# Altium PCB PCB.PcbDoc
Units mm, origin at the board's own origin, x right, y up, seen from the top; angles counter-clockwise.
Board outline 68.95 x 68.22 mm, 3 copper layers (Top Layer, Mid-Layer 1, Bottom Layer); 72 components, 51 nets, 203 pads, 270 vias.
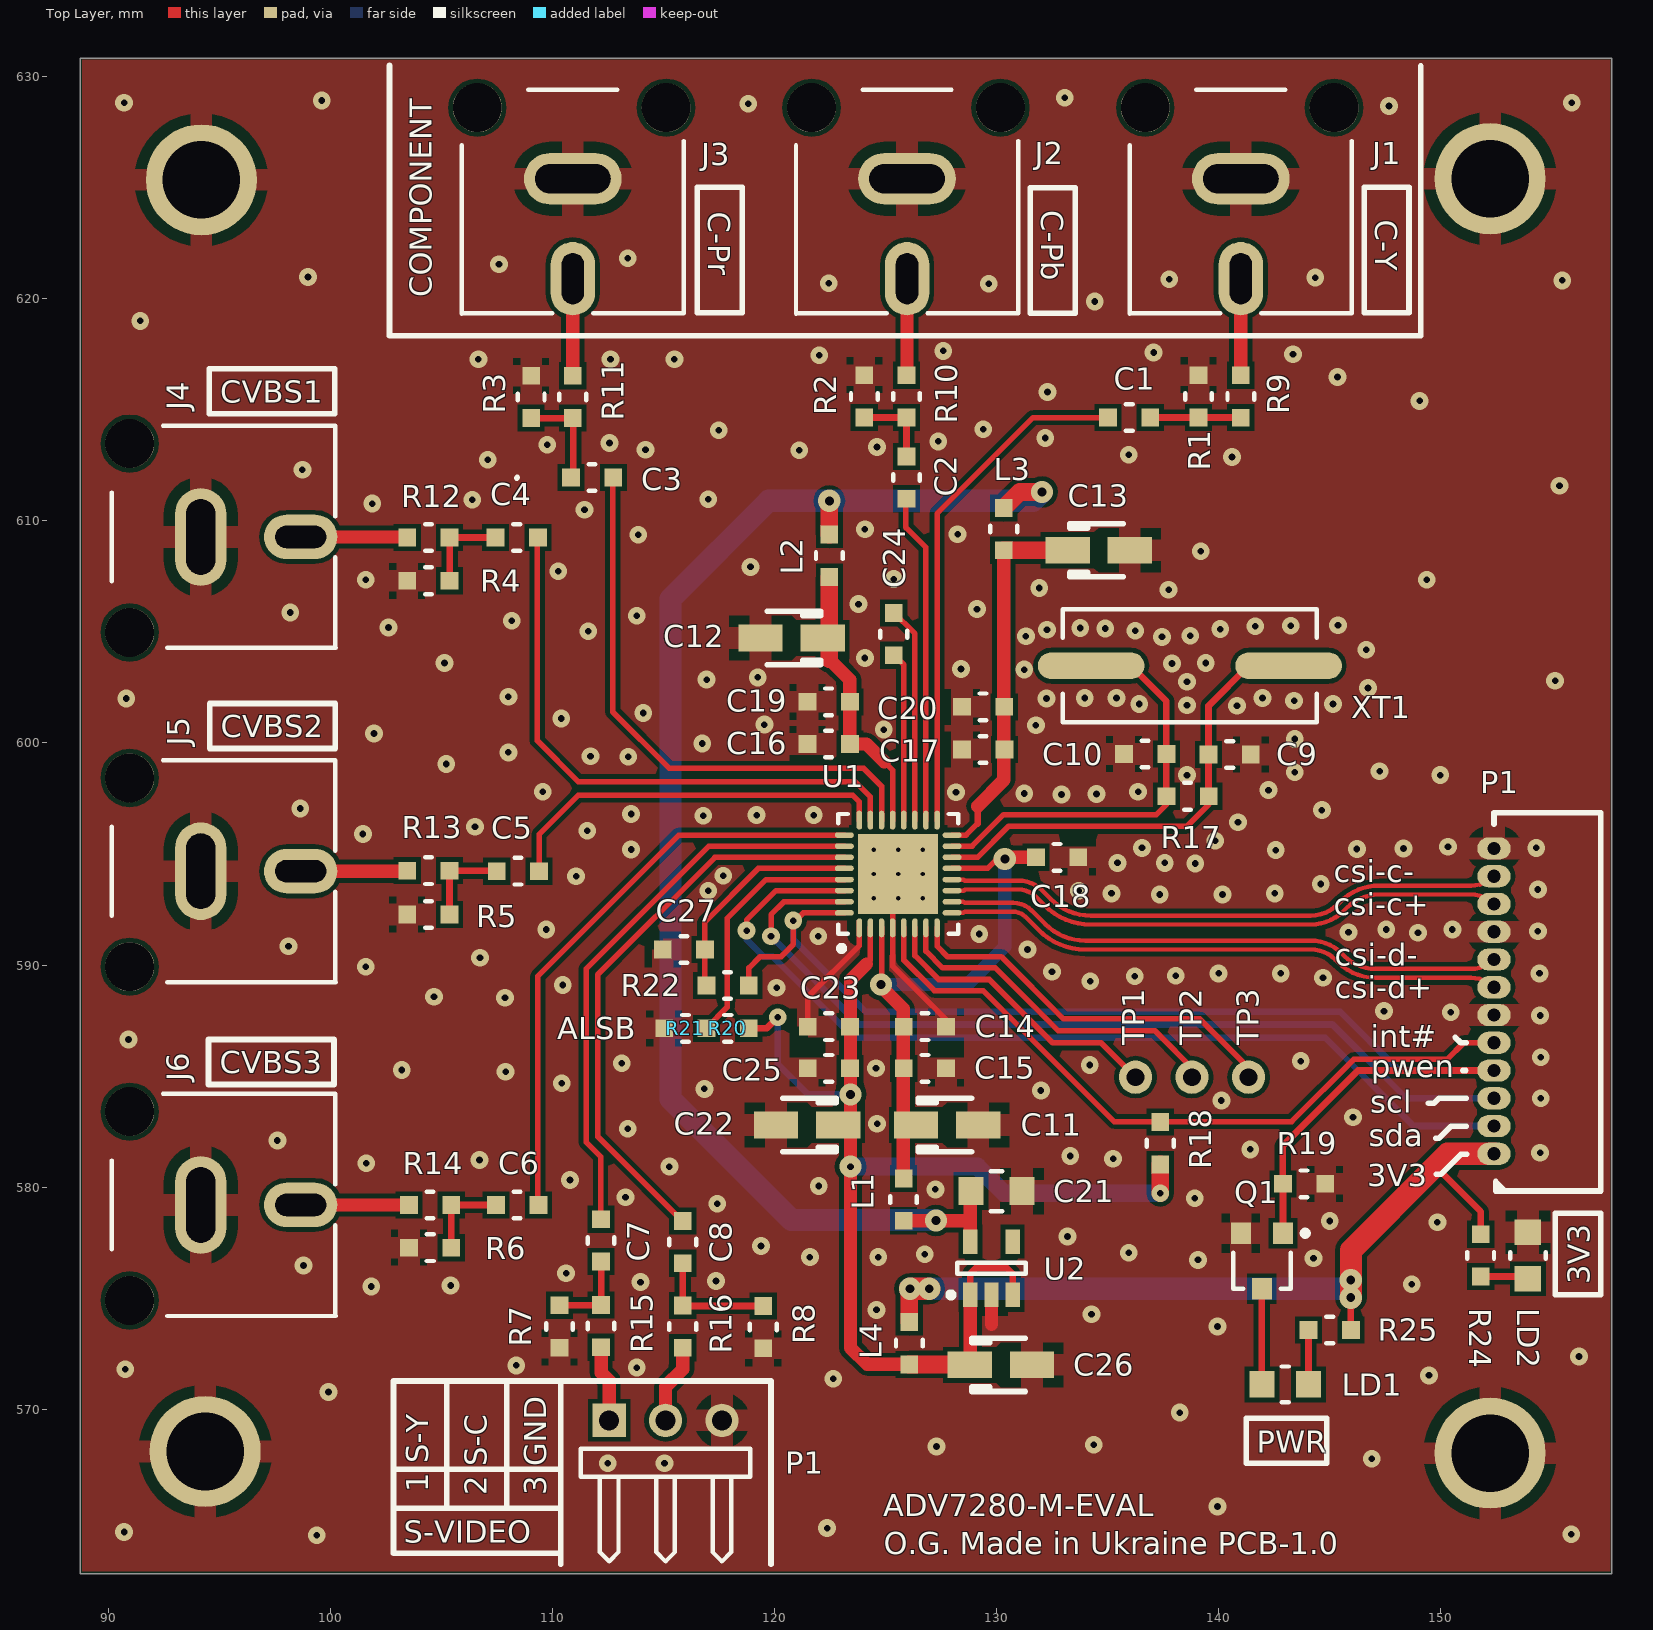
[diagram p0: Top Layer view]
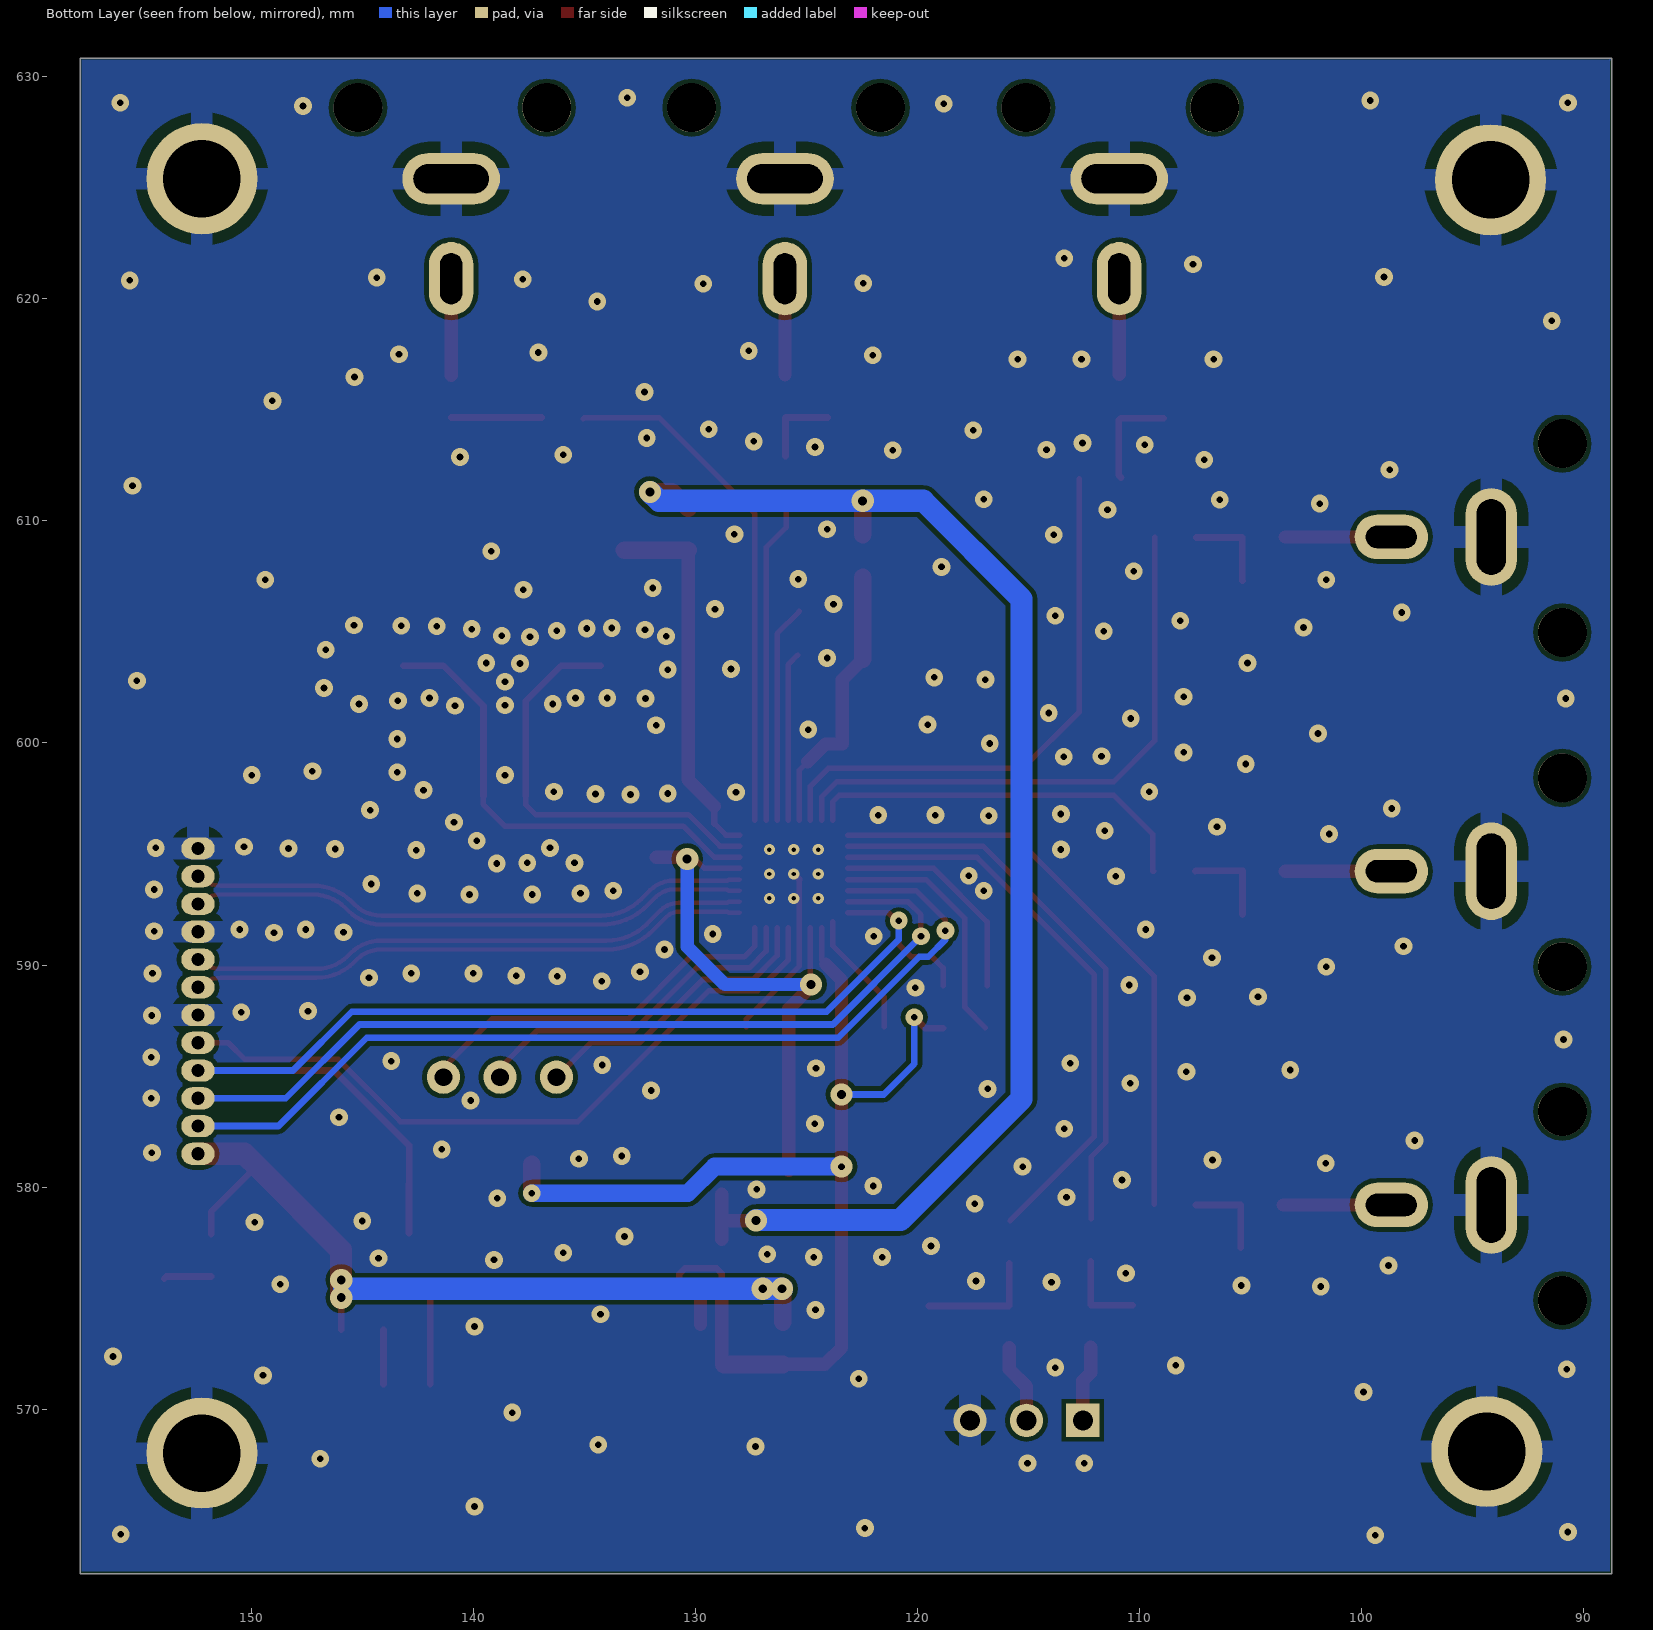
[diagram p1: Bottom Layer view, seen from below]
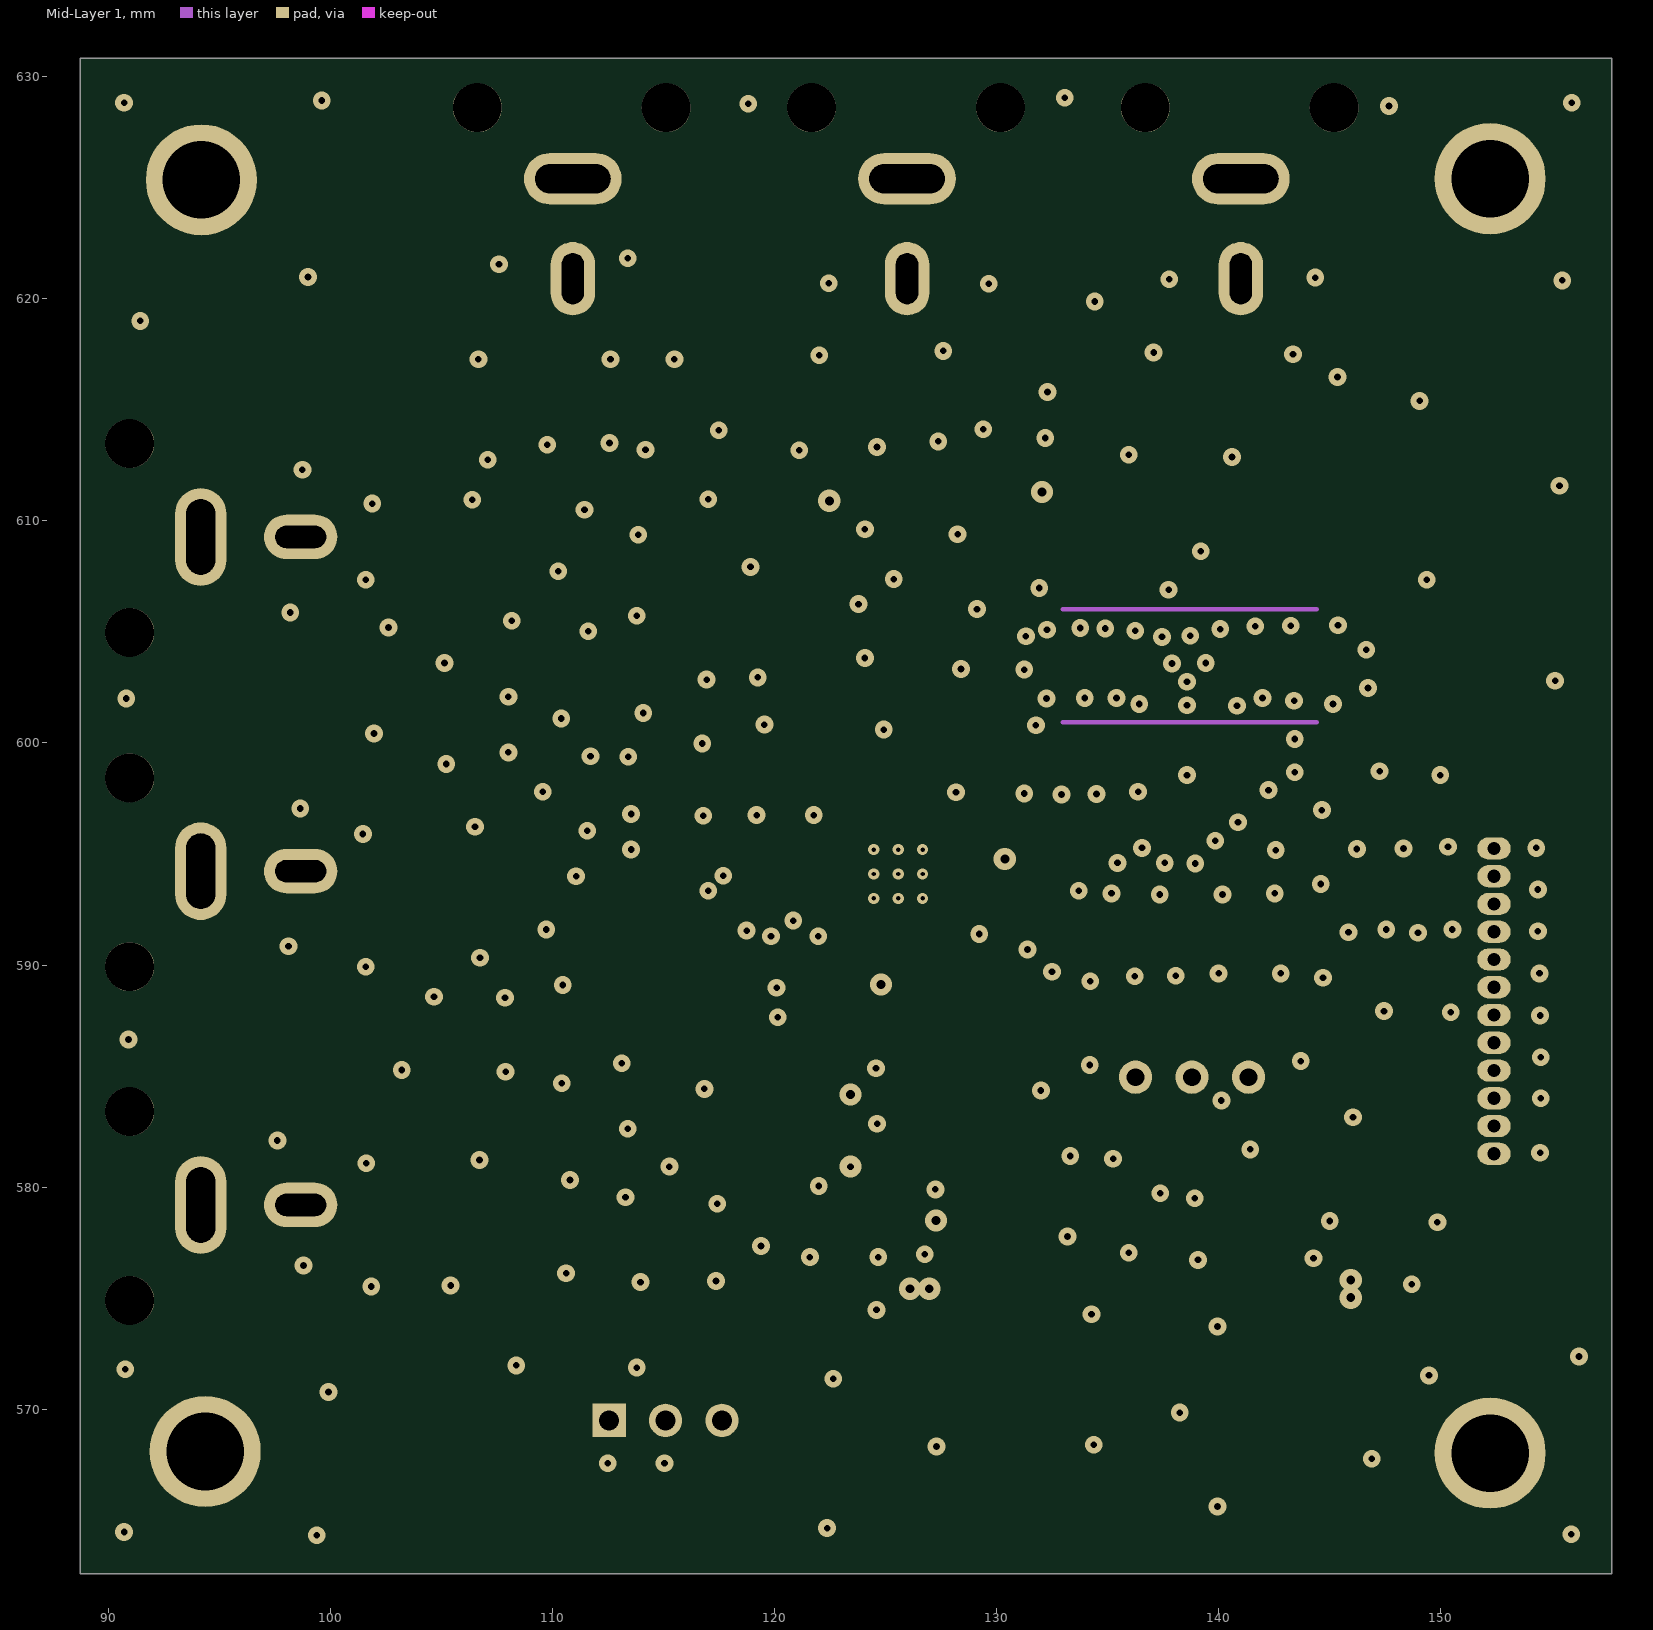
[diagram p2: Mid-Layer 1]
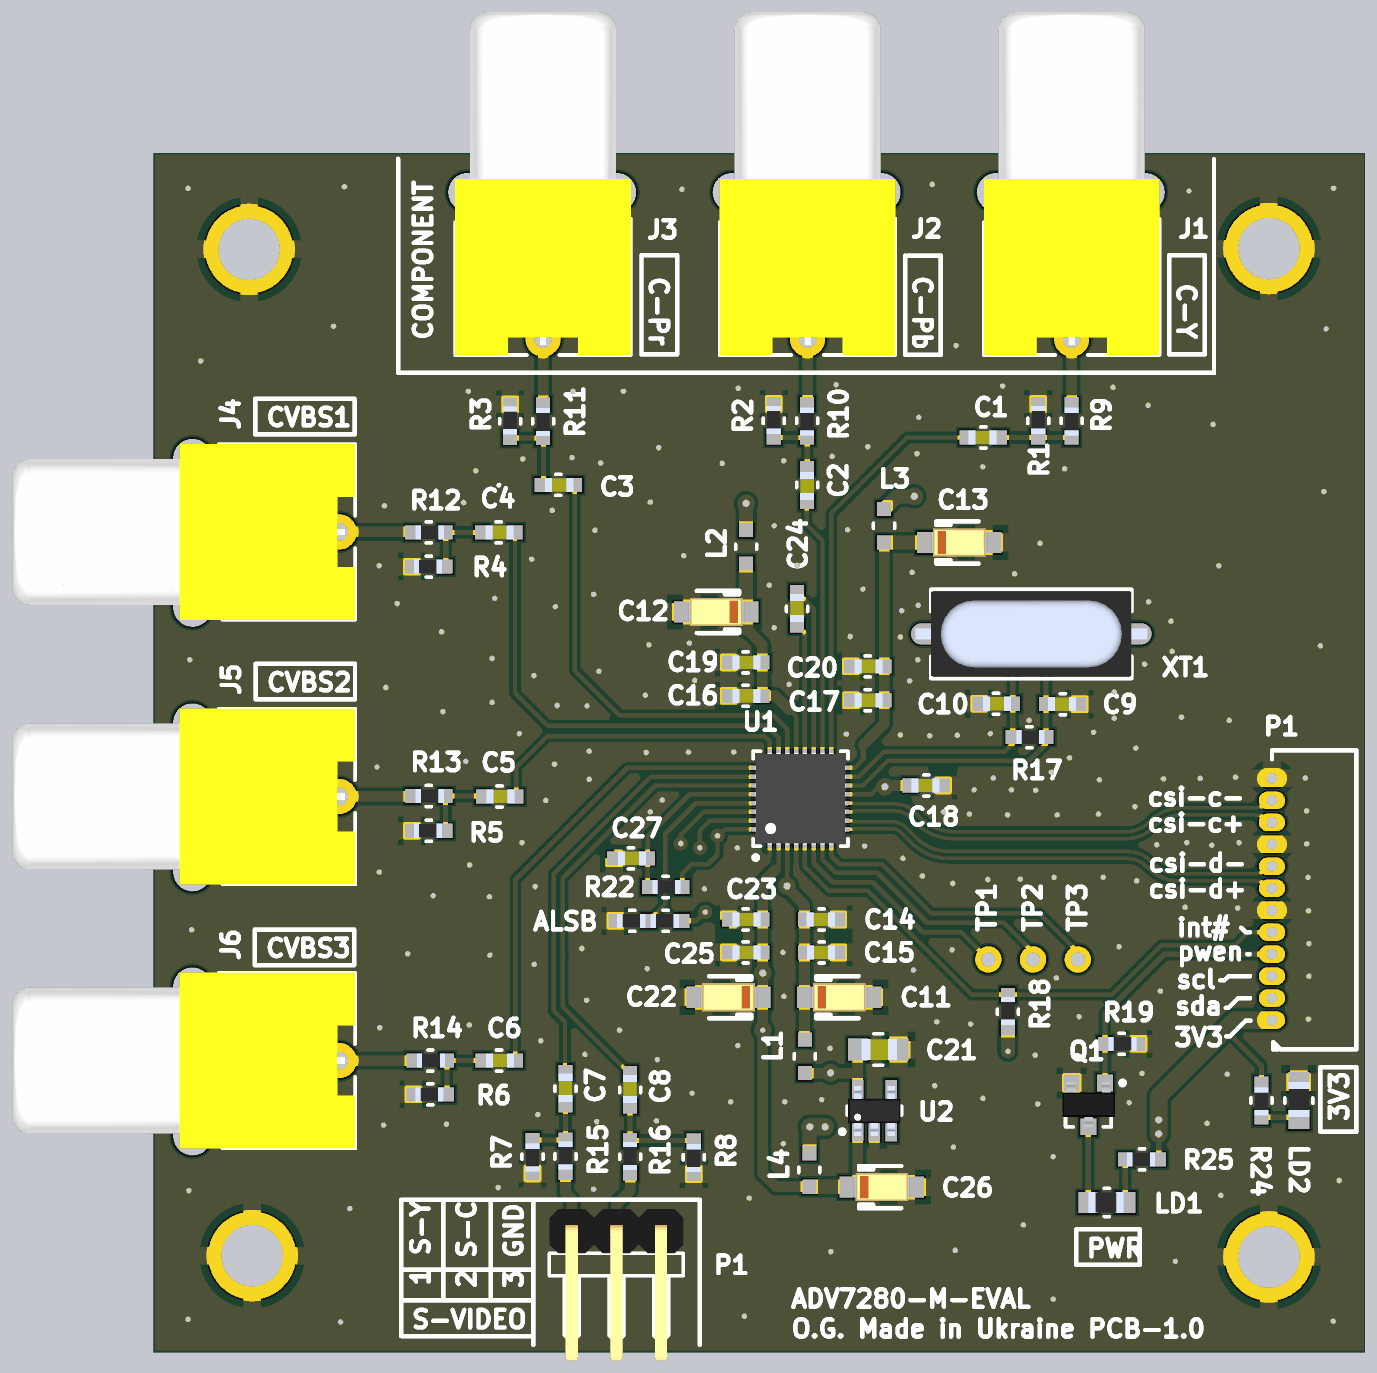
[diagram p3: 3D render of the assembled board from above, using the file's embedded part models]

## Layer stack, top to bottom
Top Solder: solder mask 0.0102, Solder Resist, Dk 3.5
Top Layer: signal copper 0.0356
Dielectric 1: dielectric 0.32, FR-4, Dk 4.8
Mid-Layer 1: signal copper 0.0356
Dielectric2: dielectric 0.32, FR-4, Dk 4.8
Bottom Layer: signal copper 0.0356
Bottom Solder: solder mask 0.0102, Solder Resist, Dk 3.5

## Board outline
88.775,630.825 88.75,630.8 88.75,562.6 157.7,562.6 157.7,630.825

## Design rules (kind name [scope] priority, off if disabled: settings)
Clearance Clearance_1 [All] p1 off: gap=0.4 ignorepadtopadclearanceinfootprint=FALSE except(0.2: Arc-SMDPad Track-SMDPad SMDPad-SMDPad)
Clearance [All] p2: gap=0.2 ignorepadtopadclearanceinfootprint=FALSE
DiffPairsRouting [All] p1: maxlimit=0.2 minlimit=0.2 mostfreqgap=0.2 toplayer_minwidth=0.2 toplayer_maxwidth=0.2 toplayer_prefwidth=0.2 midlayer1_minwidth=0.2 midlayer1_maxwidth=0.2 midlayer1_prefwidth=0.2 bottomlayer_minwidth=0.2 bottomlayer_maxwidth=0.2 bottomlayer_prefwidth=0.2 maxuncoupledlength=0
MatchedLengths [All] p1: tolerance=1 checknetsindiffpair=TRUE checkdiffpairvsdiffpair=FALSE checkxsignals=FALSE checkothers=FALSE
MaxMinImpedance [All] p1: minimum=100,0 maximum=100,0
ParallelSegment [All] p1: limit=254 gap=0.254
PlaneConnect [All] p1: pad.planeconnectstyle=Relief pad.reliefexpansion=0.508 pad.reliefentries=4 pad.reliefconductorwidth=1 pad.reliefairgap=0.5 via.planeconnectstyle=Direct via.reliefexpansion=0.508 via.reliefentries=4 via.reliefconductorwidth=0.254 via.reliefairgap=0.254
PolygonConnect [All] p1: thpad.connectstyle=Relief thpad.reliefconductorwidth=1 thpad.reliefentries=4 thpad.polygonreliefangle="90 Angle" thpad.airgapwidth=0.5 smdpad.connectstyle=Relief smdpad.reliefconductorwidth=1 smdpad.reliefentries=4 smdpad.polygonreliefangle="90 Angle" smdpad.airgapwidth=0.4 via.connectstyle=Direct via.reliefconductorwidth=0.254 via.reliefentries=4 via.polygonreliefangle="90 Angle" via.airgapwidth=0.254
RoomDefinition adv7280m [InComponentClass('adv7280m')] p1 off: confinementstyle=ConfineIn formatcopy=TRUE lockcomponents=FALSE outline 264.888,480.923 309.1,480.923 309.1,502.95 264.888,502.95
RoutingCorners [All] p1: cornerstyle=Round minsetback=2.54 maxsetback=2.54
RoutingVias [All] p1: holewidth=0.3 width=0.8 viastyle="Through Hole" minholewidth=0.3 minwidth=0.8 maxholewidth=0.5 maxwidth=1
SilkToSilkClearance [All] p1: silktosilkclearance=0.2
SolderMaskExpansion [All] p1: expansion=0.102
UnRoutedNet [All] p1: checkbadconnections=TRUE
Width [All] p1: maxlimit=5 minlimit=0.2 preferedwidth=0.3
25 further rules are at their usual default settings.

## Classes and differential pairs
differential pair CSI_D0: +CSI_D0_P -CSI_D0_N
differential pair CSI_CLK: +CSI_CLK_P -CSI_CLK_N

## Components (designator, comment, footprint, x,y, rotation, side; value= is the part's Value field where it differs from the comment)
C1 "C1608X7R1H104K080AA" C0603 136.925,614.65 r180 top value=0.1uF
C2 "C1608X7R1H104K080AA" C0603 125.95,612.9 r270 top value=0.1uF
C3 "C1608X7R1H104K080AA" C0603 110.845,611.95 r0 top value=0.1uF
C4 "C1608X7R1H104K080AA" C0603 107.45,609.25 r0 top value=0.1uF
C5 "C1608X7R1H104K080AA" C0603 107.5,594.225 r0 top value=0.1uF
C6 "C1608X7R1H104K080AA" C0603 107.47,579.2 r0 top value=0.1uF
C7 "C1608X7R1H104K080AA" C0603 112.2,576.65 r90 top value=0.1uF
C8 "C1608X7R1H104K080AA" C0603 115.875,576.575 r90 top value=0.1uF
C9 "CC0603JRNPO9BN470" C0603 141.45,599.475 r180 top value=47pF
C10 "CC0603JRNPO9BN470" C0603 135.745,599.5 r0 top value=47pF
C11 "293D226X9010A2TE3" TANTAL-A-1206 127.775,582.8 r0 top value=22uF
C12 "293D226X9010A2TE3" TANTAL-A-1206 120.775,604.725 r180 top value=22uF
C13 "293D226X9010A2TE3" TANTAL-A-1206 134.6,608.675 r0 top value=22uF
C14 "CL10B103KB8NNNC" C0603 127.725,587.225 r180 top value=0.01uF
C15 "C1608X7R1H104K080AA" C0603 127.73,585.35 r180 top value=0.1uF
C16 "CL10B103KB8NNNC" C0603 121.495,599.95 r0 top value=0.01uF
C17 "CL10B103KB8NNNC" C0603 128.45,599.7 r0 top value=0.01uF
C18 "C1608X7R1H104K080AA" C0603 133.68,594.85 r180 top value=0.1uF
C19 "C1608X7R1H104K080AA" C0603 121.495,601.85 r0 top value=0.1uF
C20 "C1608X7R1H104K080AA" C0603 128.445,601.625 r0 top value=0.1uF
C21 "CL21A226MQQNNNE" C0805 129.05,579.825 r0 top value="22uF 6.3v"
C22 "293D226X9010A2TE3" TANTAL-A-1206 121.475,582.8 r180 top value=22uF
C23 "CL10B103KB8NNNC" C0603 121.5,587.225 r0 top value=0.01uF
C24 "C1608X7R1H104K080AA" C0603 125.375,603.945 r90 top value=0.1uF
C25 "C1608X7R1H104K080AA" C0603 121.5,585.35 r0 top value=0.1uF
C26 "293D226X9010A2TE3" TANTAL-A-1206 130.2,572 r0 top value=22uF
C27 "C1608X7R1H104K080AA" C0603 114.975,590.7 r0 top value=0.1uF
J1 "C-Y" RCJ-044 141,629.4 r90 top locked
J2 "C-Pb" RCJ-044 125.975,629.4 r90 top locked
J3 "C-Pr" RCJ-044 110.925,629.4 r90 top locked
J4 "CVBS1" RCJ-044 90.175,609.275 r180 top locked
J5 "CVBS2" RCJ-044 90.175,594.225 r180 top locked
J6 "CVBS3" RCJ-044 90.175,579.2 r180 top locked
L1 "BLM18AG102SN1D" IND0603 125.82,578.487 r90 top value=EMIF
L2 "BLM18AG102SN1D" IND0603 122.475,609.38 r270 top value=EMIF
L3 "BLM18AG102SN1D" IND0603 130.325,610.58 r270 top value=EMIF
L4 "BLM18AG102SN1D" IND0603 126.075,573.925 r270 top value=EMIF
LD1 "LED_Y" R0805 143.95,571.125 r180 top
LD2 "LED_G" R0805 153.925,575.975 r90 top
P1 "S-VIDEO" PLS-3R 112.56,569.5 r0 top locked
P1 "HDR 12" 1.25-12AW 152.4,588.375 r90 top locked
Q1 "IRLML2402" SOT-23-3 141.95,576.675 r180 top
R1 "51" R0603 139.1,614.65 r90 top
R2 "51" R0603 124.05,614.65 r90 top
R3 "51" R0603 109.05,614.625 r90 top
R4 "51" R0603 105.375,607.3 r180 top
R5 "51" R0603 105.375,592.275 r180 top
R6 "51" R0603 105.455,577.275 r180 top
R7 "51" R0603 110.325,574.68 r270 top
R8 "51" R0603 119.5,574.65 r270 top
R9 "24" R0603 141,616.55 r270 top
R10 "24" R0603 125.95,616.555 r270 top
R11 "24" R0603 110.925,616.53 r270 top
R12 "24" R0603 103.475,609.25 r0 top
R13 "24" R0603 103.475,594.25 r0 top
R14 "24" R0603 103.55,579.2 r0 top
R15 "24" R0603 112.2,572.795 r90 top
R16 "24" R0603 115.875,572.77 r90 top
R17 "1M" R0603 137.65,597.6 r0 top
R18 "10k" R0603 137.375,581.025 r90 top
R19 "47k" R0603 142.895,580.15 r0 top
R20 "10k" R0603 118.85,587.15 r180 top
R21 "DNI" R0603 116.945,587.15 r180 top
R22 "15k" R0603 116.945,589.075 r0 top
R24 "470" R0603 151.8,577.88 r270 top
R25 "470" R0603 145.955,573.575 r180 top
TP1 "TEST-POINT" PAD 136.26,584.95 r0 top
TP2 "TEST-POINT" PAD 138.8,584.95 r0 top
TP3 "TEST-POINT" PAD 141.35,584.95 r0 top
U1 "ADV7280BCPZ-M" CP-32-12 125.575,594.1 r90 top locked
U2 "TLV75718PDBVR" SOT-23-5 129.775,576.35 r90 top locked value=TLV733P
XT1 "28.63636 MHz" HC-49/S-SMD 143.15,603.475 r180 top

## Footprints (in the part's own frame and the unit in brackets; to place one, negate y for a bottom-side part, rotate by r counter-clockwise, add the part's x,y. Pads: shape width x height; smd on the part's side, far side on the other; paste and mask are expansions set on the pad)
1.25-12AW [mm] "Connector; 12 Positions; Right Angle"
  oval 1x1.5 hole 0.6: 1(-6.875,0) 2(-5.625,0) 3(-4.375,0) 4(-3.125,0) 5(-1.875,0) 6(-0.625,0) 7(0.625,0) 8(1.875,0) 9(3.125,0) 10(4.375,0) 11(5.625,0) 12(6.875,0)
  silkscreen extent -8.54,-4.8 8.48,0
C0603 [mm]
  rect 0.8x0.8 smd: 1(1.905,0) 2(0,0)
  silkscreen extent 0.8,-0.6 1.1,0.6, body extent 0.2,-0.4 1.8,0.4, height 0.9
C0805 [mm]
  rect 1.14x1.27 smd: 1(2.1,0) 2(-0.2,0)
  silkscreen extent 0.7,-0.9 1.2,0.9, body extent 0,-0.6 2,0.6, height 0.9
CP-32-12 [mm] "32-Lead Lead Frame Chip Scale Package 5?5mm Body, Very Very Thin Quad  (CP-32-12)"
  oval 0.85x0.25 smd: 1(-2.425,1.75) 2(-2.425,1.25) 3(-2.425,0.75) 4(-2.425,0.25) 5(-2.425,-0.25) 6(-2.425,-0.75) 7(-2.425,-1.25) 8(-2.425,-1.75) 17(2.425,-1.75) 18(2.425,-1.25) 19(2.425,-0.75) 20(2.425,-0.25) 21(2.425,0.25) 22(2.425,0.75) 23(2.425,1.25) 24(2.425,1.75)
  oval 0.25x0.85 smd: 9(-1.75,-2.425) 10(-1.25,-2.425) 11(-0.75,-2.425) 12(-0.25,-2.425) 13(0.25,-2.425) 14(0.75,-2.425) 15(1.25,-2.425) 16(1.75,-2.425) 25(1.75,2.425) 26(1.25,2.425) 27(0.75,2.425) 28(0.25,2.425) 29(-0.25,2.425) 30(-0.75,2.425) 31(-1.25,2.425) 32(-1.75,2.425)
  rect 3.6x3.6 smd: 33(0,0)
  silkscreen extent -3.47,-2.7 2.7,2.7, body extent -2.6,-2.6 2.6,2.6, height 0.8
HC-49/S-SMD [mm]
  oval 4.8x1.2 smd: 1(0,0) 2(8.89,0)
  Mid-Layer 1 lines w0.2: 10.16,2.54 -1.27,2.54 ; 10.16,-2.54 9.525,-2.54 -1.27,-2.54
  silkscreen extent -1.27,-2.54 10.16,2.54, body extent -2.16,-2.4 11.05,2.4, height 4.3
IND0603 [mm]
  rect 0.8x0.8 smd: 1(1.905,0) 2(0,0)
  silkscreen extent 0.8,-0.6 1.1,0.6
PAD [mm]
  round 1.5 hole 0.8: 1(0,0)
PLS-3R [mm] "Connector; Header; 3 Position; Right Angle"
  rect 1.5x1.5 hole 0.9: 1(0,0)
  round 1.5 hole 0.9: 2(2.54,0) 3(5.08,0)
  silkscreen extent -1.27,-6.35 6.35,-1.27, body extent -1.27,-7.36 6.35,1.26, height 5.45
R0603 [mm]
  rect 0.8x0.8 smd: 1(1.905,0) 2(0,0)
  silkscreen extent 0.8,-0.6 1.1,0.6, body extent 0.2,-0.4 1.8,0.4, height 0.5
R0805 [mm]
  rect 1.14x1.2 smd: 1(2,0) 2(-0.1,0)
  silkscreen extent 0.79,-0.8 1.1,0.8, body extent 0,-0.6 2,0.6, height 0.5
RCJ-044 [mm] "Two Conductor Jack (RCA), Right Angle, Thru-Hole, Body 10x10x13 mm (WxTxH)"
  oval 2.3x4.4 hole 1.3 slot 3.4 at 90 deg: 1(-4,0)
  oval 3.3x2 hole 1 slot 2.3 at 0 deg: 2(-8.5,0)
  round 2.2 hole 2.2 unplated: H(-0.8,4.3) H(-0.8,-4.2)
  silkscreen extent -10.07,-5 0,5, body extent -10.05,-5 9.45,5, height 12
SOT-23-3 [mm]
  rect 0.9x0.95 smd: 1(-0.95,-1.25) 2(0.95,-1.25) 3(0,1.25)
  silkscreen extent -2.07,-1.37 1.3,1.25, body extent -1.52,-1.29 1.48,1.25, height 1.1
SOT-23-5 [mm] "SOT23, 5-Leads, Body 2.9x1.6mm, Pitch 0.95mm, Lead Span 2.8mm, IPC Medium Density"
  rect 1.1x0.65 smd: 1(-1.2,0.95) 2(-1.2,0) 3(-1.2,-0.95) 4(1.2,-0.95) 5(1.2,0.95)
  silkscreen extent -1.32,-1.55 0.25,1.95, body extent -1.44,-1.5 1.4,1.5, height 1.1
TANTAL-A-1206 [mm]
  rect 2x1.2 smd: 1(-1.4,0) 2(1.4,0)
  silkscreen extent -1.3,-1.2 1.1,1.2, body extent -1.6,-0.8 1.6,0.8, height 1.8

## Part data
C1 C2 C3 C4 C5 C6 C7 C8 C9 C10 C14 C15 C16 C17 C18 C19 C20 C21 C23 C24 C25 C27: library part CAP_NPOL, "CAP_NPOL"
C11 C12 C13 C22 C26: library part CAP_POL, "CAP_POL"
J1 J2 J3 J4 J5 J6: library part RCA, "RCA Phono Jack, Right Angle, Thru-Hole, Snap-In"
L1 L2 L3 L4: library part IND_WO_IRON, "IND_WO_IRON"
LD1: library part LED_YELLOW, "LED Yellow"
LD2: library part LED_GREEN, "LED Green"
P1: library part "HDR 3", "Header, 3-Pin", LatestRevisionDate=17-Jul-2002, LatestRevisionNote="Re-released for DXP Platform.", Publisher="Altium Limited"
P1: "Header, 12-Pin", LatestRevisionDate=17-Jul-2002, LatestRevisionNote="Re-released for DXP Platform.", Publisher="Altium Limited"
Q1: library part N-Channel, "HEXFET Power MOSFET"
R1 R2 R3 R4 R5 R6 R7 R8 R9 R10 R11 R12 R13 R14 R15 R16 R17 R18 R19 R20 R21 R22 R24 R25: library part RESISTOR, "RES"
TP1 TP2 TP3: "PCB terminal block"
U1: "10-Bit, 4xOversampling SDTV Video Decoder"
U2: library part TLV733P, "Capacitor-Free, 300-mA, Low-Dropout Regulator with Foldback Current Limit for Portable Devices"
XT1: library part XTAL, "Xtal"

## Free pads (board coordinates)
  round 5 hole 3.5: MH(94.2,625.35) MH(94.375,568.1) MH(152.225,568.025) MH(152.225,625.4)

## Via types
v1: diameter 0.8, hole 0.3, Top Layer to Bottom Layer, tented both sides, 250 vias
v2: diameter 1, hole 0.4, Top Layer to Bottom Layer, tented both sides, 10 vias
v3: diameter 0.5, hole 0.2, Top Layer to Bottom Layer, 9 vias
v4: diameter 1, hole 0.3, Top Layer to Bottom Layer, tented both sides, 1 vias

## Nets (pads, with @x,y where several pads share a name; then routed paths per layer and width w, separated by ;. In a path a pad name is that pad's centre, name@x,y a point inside that pad or via, vN(x,y) a via of type N, cw(c..) or ccw(c..) an arc to the next point about the centre after c; other vN are vias at no path point)
3V3: L4.2 P1.1@152.4,581.5 R24.2 R25.2 | length 37.9
  Top Layer w0.3: v2@126.075,575.4 v2(126.1,575.425) ; R25.2 v2@145.955,575.025 ; 149.65,580.85 149.85,580.85 151.8,578.9 R24.2
  Top Layer w0.8: L4.2 v2@126.075,575.4
  Top Layer w1: v2(126.1,575.425) v2(126.975,575.425) ; v2@145.955,575.025 145.955,577.155 149.65,580.85 150.3,581.5 P1.1@152.4,581.5
  Bottom Layer w1: v2(126.1,575.425) v2(126.975,575.425) v2@145.825,575.425
  other v2: 145.95,575.025 145.95,575.825
ADV_1V8: C21.2 L1.2 L2.2 L3.2 U2.5 | length 64
  Top Layer w0.6: L1.2 128.825,578.487 ; U2.5@128.825,577.65 128.825,578.487 ; C21.2@128.825,579.675 128.825,578.487
  Top Layer w0.8: L2.2 v2(122.475,610.9) ; L3.2 131.045,611.3 v2(132.05,611.3)
  Bottom Layer w1: v2@127.275,578.525 120.775,578.525 115.325,583.975 115.325,606.475 119.75,610.9 v2(122.475,610.9) 131.65,610.9 v2(132.05,611.3)
  other v2: 127.275,578.5
ADV_AVDD: C12.1 C16.1 C19.1 L2.1 U1.21 | length 12.5
  Top Layer w0.25: 124.95,599.15 125.325,598.775 U1.21
  Top Layer w0.6: 122.475,603.775 123.4,602.85 C19.1 C16.1 124.15,599.95 124.95,599.15
  Top Layer w0.8: 122.475,603.775 L2.1@122.475,607.45
ADV_DVDD: C11.1 C14.1 C15.1 C18.1 L1.1 U1.3 U1.13 | length 25.5
  Top Layer w0.25: v2@124.825,589 U1.3 ; U1.13 129.6,594.35 v2@130.025,594.775
  Top Layer w0.3: v2@130.025,594.775 v2(130.375,594.775) v2@130.45,594.85
  Top Layer w0.6: v2@124.825,589 125.8,588.025 L1.1@125.8,580.755 ; v2@130.45,594.85 C18.1
  Bottom Layer w0.6: v2(124.8,589.125) 128.675,589.125 130.375,590.825 v2(130.375,594.775)
ADV_PVDD: C13.1 C17.1 C20.1 L3.1 U1.16 | length 17
  Top Layer w0.25: U1.16 128.628,595.85 129.15,596.372
  Top Layer w0.3: 129.15,596.372 129.15,597.155
  Top Layer w0.6: 129.15,597.155 130.325,598.329 L3.1@130.325,608.65
  Top Layer w0.8: L3.1 C13.1
ADV_VDDIO: C22.1 C23.1 C25.1 C26.1 L4.1 R18.2 R20.2 U1.2 U2.1 U2.3 | length 55.3
  Top Layer w0.25: 124.15,590.05 124.325,590.225 U1.2
  Top Layer w0.3: R20.2 119.65,587.15 v1(120.15,587.65) ; C26.1@128.72,572.02 C26.1@128.825,572.125 ; U2.1 128.825,576.125 129.05,576.35 130.475,576.35 130.725,576.1 U2.3
  Top Layer w0.6: 124.15,590.05 123.425,589.325 v2(123.425,584.175) v4(123.425,580.925) 123.425,572.775 124.18,572.02 L4.1 ; C26.1@128.825,572.125 U2.1
  Top Layer w0.8: L4.1 C26.1@128.72,572.02 ; v1(137.375,579.725) R18.2
  Bottom Layer w0.3: v1(120.15,587.65) 120.15,585.55 121.525,584.175 v2(123.425,584.175)
  Bottom Layer w0.8: v4(123.425,580.925) 129.15,580.925 130.35,579.725 v1(137.375,579.725)
ALSB: R20.1 R21.2 U1.29 | length 11.3
  Top Layer w0.25: R21.2@116.95,587.175 117.875,588.1 117.875,592.1 119.625,593.85 U1.29
C-Pb: C2.1 U1.18 | length 14.8
  Top Layer w0.25: C2.1@125.925,610.975 125.925,609.7 126.825,608.8 U1.18
C-Pr: C3.1 U1.22 | length 25.5
  Top Layer w0.25: C3.1@112.725,611.9 112.725,601.4 115.275,598.85 124.025,598.85 124.825,598.05 U1.22
C-Y: C1.1 U1.17 | length 23.3
  Top Layer w0.25: U1.17 127.325,610.325 131.65,614.65 135,614.65 C1.1@135.05,614.6
CSI_CLK_N: P1.11 U1.12 | length 25.4
  Top Layer w0.2: U1.12 128.525,593.85 128.575,593.8 130.99,593.8 cw(c130.99,592.29) 132.058,593.358 132.447,592.969 ccw(c134.243,594.765) 134.243,592.225 144.157,592.225 ccw(c144.157,593.898) 145.34,592.715 145.475,592.85 cw(c147.225,591.1) 147.225,593.575 151.374,593.575 ccw(c151.374,595.026) P1.11
CSI_CLK_P: P1.10 U1.11 | length 25.4
  Top Layer w0.2: U1.11 128.525,593.35 128.575,593.4 130.99,593.4 cw(c130.99,592.29) 131.775,593.075 132.164,592.686 ccw(c134.243,594.765) 134.243,591.825 144.157,591.825 ccw(c144.157,593.898) 145.623,592.432 145.758,592.567 cw(c147.225,591.1) 147.225,593.175 151.374,593.175 cw(c151.374,591.724) P1.10
CSI_D0_N: P1.8 U1.10 | length 25.4
  Top Layer w0.2: U1.10 128.454,592.85 cw(c128.454,592.679) 128.575,592.8 130.75,592.8 cw(c130.75,591.615) 131.588,592.453 132.197,591.844 ccw(c133.993,593.64) 133.993,591.1 144.157,591.1 cw(c144.157,589.148) 145.537,590.528 145.658,590.408 ccw(c147.065,591.815) 147.065,589.825 151.374,589.825 ccw(c151.374,591.276) P1.8
CSI_D0_P: P1.7 U1.9 | length 25.4
  Top Layer w0.2: U1.9 128.454,592.35 ccw(c128.454,592.521) 128.575,592.4 130.75,592.4 cw(c130.75,591.615) 131.305,592.17 131.914,591.561 ccw(c133.993,593.64) 133.993,590.7 144.157,590.7 cw(c144.157,589.148) 145.255,590.245 145.375,590.125 ccw(c147.065,591.815) 147.065,589.425 151.374,589.425 cw(c151.374,587.974) P1.7
CVBS1: C4.1 U1.23 | length 26.2
  Top Layer w0.25: C4.1@109.325,609.25 109.325,600.1 111.175,598.25 123.65,598.25 124.325,597.575 U1.23
CVBS2: C5.1 U1.24 | length 17.8
  Top Layer w0.25: C5.1@109.375,594.225 C5.1 109.405,595.88 111.175,597.65 123.525,597.65 123.825,597.35 U1.24
CVBS3: C6.1 U1.25 | length 26.7
  Top Layer w0.25: C6.1@109.35,579.225 109.35,589.5 115.7,595.85 U1.25
GND: C9.2 C10.2 C11.2 C12.2 C13.2 C14.2 C15.2 C16.2 C17.2 C18.2 C19.2 C20.2 C21.1 C22.2 C23.2 C25.2 C26.2 C27.2 J1.1 J2.1 J3.1 J4.1 J5.1 J6.1 LD2.1 P1.3@117.64,569.5 P1.6 P1.9 P1.12 pad.MH Q1.2 R1.1 R2.1 R3.1 R4.1 R5.1 R6.1 R7.1 R8.1 R19.1 R21.1 U1.1 U1.4 U1.33 U2.2 | length 15
  Top Layer w0.25: C23.2 121.5,588.55 123.825,590.875 U1.1 U1.1@123.825,591.95 ; U1.33@125.325,593.85 U1.4 125.325,589.95 127.725,587.55 C14.2
  Top Layer w0.3: U1.33@125.325,593.85 v3(125.575,594.1)
  Top Layer w0.6: 129.775,573.825 U2.2
  other v1: 99.4,564.325 155.875,564.375 90.725,564.475 122.375,564.65 139.95,565.625 112.5,567.575 115.05,567.575 146.9,567.775 127.3,568.325 134.375,568.4 138.25,569.85 99.925,570.775 122.65,571.375 149.475,571.525 90.775,571.8 113.8,571.875 108.375,571.975 156.225,572.375 139.95,573.725 134.275,574.275 124.6,574.475 101.85,575.525 105.425,575.575 148.7,575.625 113.975,575.725 117.375,575.775 110.625,576.125 98.8,576.475 139.075,576.725 144.275,576.8 121.6,576.85 124.675,576.85 126.775,576.975 135.95,577.05 119.4,577.35 133.2,577.775 149.85,578.425 145,578.475 117.425,579.25 138.925,579.5 113.3,579.55 127.25,579.9 122,580.05 110.8,580.325 115.275,580.925 101.625,581.075 106.725,581.225 135.25,581.275 133.325,581.4 154.475,581.55 141.425,581.7 97.625,582.1 113.4,582.625 124.625,582.85 146.05,583.15 140.125,583.9 154.5,584 132,584.35 116.85,584.425 110.425,584.675 107.9,585.2 103.225,585.275 124.575,585.35 134.2,585.5 113.125,585.575 143.7,585.675 154.5,585.85 90.925,586.65 154.475,587.725 150.45,587.875 147.45,587.925 107.875,588.525 104.675,588.575 120.1,588.975 110.475,589.1 134.225,589.275 144.7,589.425 136.225,589.5 138.075,589.52 140,589.625 142.8,589.625 154.45,589.625 132.5,589.7 101.6,589.925 106.75,590.325 131.4,590.7 98.125,590.85 121.975,591.3 129.225,591.4 148.975,591.45 145.85,591.475 154.375,591.525 109.725,591.6 147.55,591.6 150.525,591.6 137.35,593.175 140.175,593.175 135.175,593.225 142.525,593.225 117.025,593.35 133.7,593.35 154.375,593.4 144.6,593.65 111.075,594 117.7,594.025 138.95,594.575 135.45,594.6 137.575,594.6 142.575,595.175 113.55,595.2 146.225,595.225 148.325,595.25 136.55,595.275 154.3,595.275 150.325,595.325 139.85,595.6 101.475,595.9 111.575,596.05 106.525,596.225 140.875,596.425 116.8,596.725 119.2,596.75 121.775,596.75 113.55,596.8 144.65,596.975 98.65,597.05 132.925,597.675 134.5,597.7 131.25,597.725 128.175,597.775 109.575,597.8 136.375,597.8 142.25,597.875 138.575,598.55 149.975,598.55 143.425,598.675 147.25,598.725 105.225,599.05 113.425,599.375 111.725,599.4 108.025,599.575 116.75,599.973 143.425,600.175 101.975,600.425 124.927,600.6 131.775,600.8 119.55,600.825 110.4,601.1 114.1,601.35 140.825,601.675 138.575,601.7 136.425,601.75 145.15,601.75 143.4,601.9 90.825,602 132.25,602 133.975,602.025 135.4,602.025 141.975,602.025 108.025,602.075 146.725,602.475 138.575,602.75 155.15,602.8 116.95,602.85 119.25,602.95 131.25,603.3 128.404,603.325 137.9,603.575 105.15,603.6 139.425,603.6 124.075,603.825 146.65,604.2 137.45,604.775 131.325,604.8 138.725,604.825 111.625,605.025 136.25,605.05 132.275,605.1 140.075,605.125 134.9,605.15 133.775,605.175 102.625,605.2 141.65,605.25 143.25,605.275 145.375,605.3 108.175,605.5 113.8,605.725 98.2,605.875 129.125,606.025 123.79,606.25 137.75,606.9 131.925,606.975 101.6,607.35 149.375,607.35 125.375,607.375 110.275,607.725 118.925,607.925 139.2,608.625 113.875,609.375 128.25,609.4 124.075,609.625 111.45,610.5 101.9,610.775 106.4,610.95 117.025,610.975 155.35,611.575 98.75,612.3 107.1,612.75 140.6,612.875 135.95,612.975 121.125,613.175 114.2,613.2 124.617,613.325 109.775,613.425 112.575,613.5 127.375,613.575 132.2,613.725 117.5,614.075 129.4,614.125 149.05,615.4 132.3,615.8 145.35,616.475 106.675,617.275 112.625,617.275 115.5,617.275 122.025,617.45 143.35,617.5 137.075,617.575 127.6,617.65 91.45,619 134.425,619.875 129.65,620.675 122.45,620.7 155.475,620.825 137.775,620.875 144.35,620.95 99,620.975 107.6,621.55 113.4,621.825 147.675,628.675 118.825,628.775 90.725,628.825 155.9,628.825 99.625,628.925 133.075,629.05
  other v3: 124.475,593 125.575,593 126.675,593 124.475,594.1 126.675,594.1 124.475,595.2 125.575,595.2 126.675,595.2
I2C_SCL: P1.3@152.4,584 U1.31 | length 40.1
  Top Layer w0.25: v1(119.85,591.3) 119.85,592.275 120.425,592.85 U1.31
  Bottom Layer w0.3: v1(119.85,591.3) 120.025,591.125 120.025,591.118 123.818,587.325 145.125,587.325 148.45,584 P1.3@152.4,584
I2C_SDA: P1.2@152.4,582.75 U1.30 | length 43
  Top Layer w0.25: v1(118.75,591.55) 118.75,592.025 120.075,593.35 U1.30
  Bottom Layer w0.3: v1(118.75,591.55) 118.75,591.15 119.525,590.375 119.925,590.375 123.575,586.725 144.8,586.725 148.775,582.75 P1.2@152.4,582.75
INT#: P1.5 R18.1 U1.5 | length 32.5
  Top Layer w0.25: U1.5 125.825,590.225 127.2,588.85 129.4,588.85 135.3,582.95 143.284,582.95 146.083,585.749 150.285,585.749 151.036,586.5 P1.5
NetC1_2: C1.2 R1.2 R9.1 | length 4.1
  Top Layer w0.3: C1.2 R1.2 140.995,614.65 R9.1
NetC2_2: C2.2 R2.2 R10.1 | length 3.6
  Top Layer w0.3: R2.2 R10.1 C2.2
NetC3_2: C3.2 R3.2 R11.1 | length 4.7
  Top Layer w0.3: R3.2@108.925,614.625 110.845,614.625 110.95,614.52 110.95,612.055 C3.2
NetC4_2: C4.2 R4.2 R12.1 | length 4
  Top Layer w0.3: R4.2 105.38,607.305 R12.1 C4.2
NetC5_2: C5.2 R5.2 R13.1 | length 4.1
  Top Layer w0.3: R5.2 105.375,594.245 R13.1 107.475,594.25 C5.2
NetC6_2: C6.2 R6.2 R14.1 | length 3.9
  Top Layer w0.3: R6.2 R14.1 C6.2
NetC7_2: C7.2 R7.2 R15.1 | length 3.8
  Top Layer w0.3: R7.2 112.18,574.68 R15.1 C7.2
NetC8_2: C8.2 R8.2 R16.1 | length 5.5
  Top Layer w0.3: C8.2 R16.1 115.9,574.65 R8.2
NetC9_1: C9.1 R17.1 U1.14 XT1.1 | length 21.3
  Top Layer w0.25: U1.14 129.15,594.85 130.55,596.25 138.575,596.25 139.555,597.23 R17.1
  Top Layer w0.3: R17.1 139.545,597.61 C9.1 139.545,601.67 141.35,603.475 XT1.1
NetC10_1: C10.1 R17.2 U1.15 XT1.2 | length 19.1
  Top Layer w0.25: U1.15 128.9,595.35 130.325,596.775 137.2,596.775 137.65,597.225 R17.2
  Top Layer w0.3: XT1.2 136.05,603.475 137.65,601.875 C10.1 R17.2
NetC24_1: C24.1 U1.19 | length 9.8
  Top Layer w0.25: C24.1@125.325,605.925 126.325,604.925 U1.19
NetC24_2: C24.2 U1.20 | length 7.6
  Top Layer w0.25: C24.2@125.4,603.95 125.825,603.525 U1.20
NetJ1_2: J1.2 R9.2 | length 4.4
  Top Layer w0.6: R9.2 J1.2
NetJ2_2: J2.2 R10.2 | length 4.4
  Top Layer w0.3: R10.2 R10.2@125.975,616.58
  Top Layer w0.6: R10.2@125.975,616.58 J2.2
NetJ3_2: J3.2 R11.2 | length 4.4
  Top Layer w0.3: R11.2@110.85,616.525 R11.2@110.925,616.6
  Top Layer w0.6: R11.2@110.925,616.6 J3.2
NetJ4_2: J4.2 R12.2 | length 4.8
  Top Layer w0.3: R12.2@103.45,609.275 R12.2
  Top Layer w0.6: J4.2 R12.2@103.45,609.275
NetJ5_2: J5.2 R13.2 | length 4.8
  Top Layer w0.3: R13.2@103.45,594.225 R13.2
  Top Layer w0.6: J5.2 R13.2@103.45,594.225
NetJ6_2: J6.2 R14.2 | length 4.9
  Top Layer w0.6: J6.2 R14.2
NetLD1_1: LD1.1 Q1.3 | length 4.3
  Top Layer w0.3: LD1.1 Q1.3
NetLD1_2: LD1.2 R25.1 | length 2.5
  Top Layer w0.3: LD1.2 R25.1
NetLD2_2: LD2.2 R24.1 | length 2.2
  Top Layer w0.3: R24.1 153.825,575.975 LD2.2
NetP1_1: P1.1@112.56,569.5 R15.2 | length 3.4
  Top Layer w0.6: R15.2 112.2,571.65 112.56,571.29 P1.1@112.56,569.5
NetP1_2: P1.2@115.1,569.5 R16.2 | length 3.6
  Top Layer w0.6: P1.2@115.1,569.5 115.1,571.025 115.875,571.8 R16.2
NetTP1_1: TP1.1 U1.6 | length 13.6
  Top Layer w0.25: U1.6 126.325,590.425 127.4,589.35 129.675,589.35 132.525,586.5 134.71,586.5 136.06,585.15 TP1.1@136.485,585.15
NetTP2_1: TP2.1 U1.7 | length 15.5
  Top Layer w0.25: U1.7 126.825,590.625 127.575,589.875 129.95,589.875 132.775,587.05 137.125,587.05 TP2.1@139.012,585.162
NetTP3_1: TP3.1 U1.8 | length 17.4
  Top Layer w0.25: U1.8 127.325,590.85 127.8,590.375 130.225,590.375 133.025,587.575 139.15,587.575 TP3.1@141.575,585.15
PWEN: P1.4 Q1.1 R19.2 R22.1 U1.32 | length 56.4
  Top Layer w0.25: R22.1 118.85,589.875 119.35,590.375 120.3,590.375 120.85,590.925 120.85,591.9 121.3,592.35 U1.32
  Top Layer w0.3: Q1.1 142.9,580.145 R19.2 142.895,581.876 146.269,585.25 P1.4
  Bottom Layer w0.3: v1(120.85,592) 120.85,591.15 124.1,587.9 145.475,587.9 148.125,585.25 P1.4
RST#: C27.1 R22.2 U1.28 | length 10.1
  Top Layer w0.25: R22.2@116.875,589.075 116.875,590.725 116.87,590.746 116.87,591.945 119.275,594.35 U1.28
S-C: C8.1 U1.27 | length 25.9
  Top Layer w0.25: C8.1@115.838,578.487 112.05,582.275 112.05,589.575 117.325,594.85 U1.27
S-Y: C7.1 U1.26 | length 25.4
  Top Layer w0.25: C7.1@112.175,578.575 112.175,580.75 112.175,580.8 112.175,581.375 111.525,582.025 111.525,589.825 117.05,595.35 U1.26
pads on no net: J1.H J2.H J3.H J4.H J5.H J6.H U2.4

## Polygon pours and split planes (outlines as drawn)
GND on Top Layer "TOP_L-01_P-001" (solid, remove dead copper, pour order 0): 88.85,630.75 88.85,562.7 157.625,562.7 157.625,630.75
no net on Bottom Layer "NONET_L-01_P-001" (solid, remove dead copper, pour order 4): 88.85,630.75 88.825,630.75
GND on Bottom Layer "BOTTOM_L-01_P-001" (solid, remove dead copper, pour order 2): 88.85,630.75 88.85,562.7 157.625,562.7 157.625,630.75

## Silkscreen, mask and mechanical layers (free items; w line width, h text height)
Top Overlay:
  lines w0.254: 102.675,630.5 102.675,618.325 149.1,618.325 149.1,630.475 ; 102.85,567.3 110.35,567.3 ; 105.25,565.575 105.25,567.3 105.25,571.275 ; 107.95,565.575 107.95,567.3 107.95,571.25 ; 108.4,611.925 108.425,611.95 ; 110.375,563.025 110.375,563.525 ; 119.85,563.025 119.85,571.275 110.375,571.275 ; 149.45,583.775 149.7,583.775 149.925,584 151.15,584 ; 149.775,582.2 149.925,582.2 150.475,582.75 151.15,582.75 ; 149.8,580.575 150,580.575 150.9,581.475 151.175,581.475 ; 150.65,586.75 150.9,586.5 151.15,586.5 ; 151,585.25 151.125,585.25 ; 102.85,565.55 102.85,571.275 110.375,571.275 ; 102.85,565.55 110.375,565.55 ; 102.85,565.55 102.85,563.525 110.375,563.525 ; 110.375,563.525 110.375,565.55 ; 110.375,565.55 110.375,571.275 ; 94.525,584.625 94.525,586.65 100.175,586.65 100.175,584.625 94.525,584.625 ; 94.55,614.825 100.2,614.825 100.2,616.85 94.55,616.85 94.55,614.825 ; 94.575,599.75 100.225,599.75 100.225,601.775 94.575,601.775 94.575,599.75 ; 116.525,619.375 118.55,619.375 118.55,625.025 116.525,625.025 116.525,619.375 ; 131.525,619.35 131.525,625 133.55,625 133.55,619.35 131.525,619.35 ; 141.25,567.575 144.875,567.575 144.875,569.6 141.25,569.6 141.25,567.575 ; 146.55,619.375 146.55,625.025 148.575,625.025 148.575,619.375 146.55,619.375 ; 155.15,575.15 155.15,578.825 157.2,578.825 157.2,575.15 155.15,575.15
  text "C-Pb" at 132.025,623.975 h1 r270
  text "C-Pr" at 117.025,623.925 h1 r270
  text "C-Y" at 147.05,623.55 h1 r270
  text "COMPONENT" at 104.575,620.075 h1 r90
  text "CVBS1" at 95.05,615.325 h1
  text "CVBS2" at 95.075,600.25 h1
  text "csi-c-" at 145.175,593.725 h1
  text "csi-c+" at 145.175,592.25 h1
  text "csi-d-" at 145.225,589.975 h1
  text "csi-d+" at 145.225,588.5 h1
  text "ALSB" at 110.225,586.65 h1
  text "int#" at 146.85,586.3 h1
  text "CVBS3" at 95.025,585.125 h1
  text "pwen" at 146.875,584.95 h1
  text "scl" at 146.825,583.35 h1
  text "sda" at 146.75,581.845 h1
  text "3V3" at 146.7,580.05 h1
  text "3V3" at 156.7,575.625 h1 r90
  text "PWR" at 141.725,568.05 h1
  text "1 S-Y" at 104.425,566.275 h1 r90
  text "2 S-C" at 107.05,566.125 h1 r90
  text "3 GND" at 109.725,566.125 h1 r90
  text "ADV7280-M-EVAL" at 124.9,565.175 h1
  text "S-VIDEO" at 103.325,564 h1
  text "O.G. Made in Ukraine PCB-1.0" at 124.925,563.475 h1
Mechanical 1:
  lines w0.254: 88.65,562.475 88.65,630.95 157.825,630.95 157.825,562.475 88.65,562.475

## Text inside footprints (layer, text, board x,y; h text height)
J1: Mechanical 1 "PCB Edge" at 145.618,629.067 h0.25 r180
J2: Mechanical 1 "PCB Edge" at 130.593,629.067 h0.25 r180
J3: Mechanical 1 "PCB Edge" at 115.543,629.067 h0.25 r180
J4: Mechanical 1 "PCB Edge" at 90.508,613.893 h0.25 r270
J5: Mechanical 1 "PCB Edge" at 90.508,598.843 h0.25 r270
J6: Mechanical 1 "PCB Edge" at 90.508,583.818 h0.25 r270